# Altium PCB MicrobitBoardExtend.PcbDoc
Units mil, origin at the board's own origin, x right, y up, seen from the top; angles counter-clockwise.
Board outline 2750 x 1700 mil, 2 copper layers (Top Layer, Bottom Layer); 43 components, 43 nets, 189 pads, 0 vias.
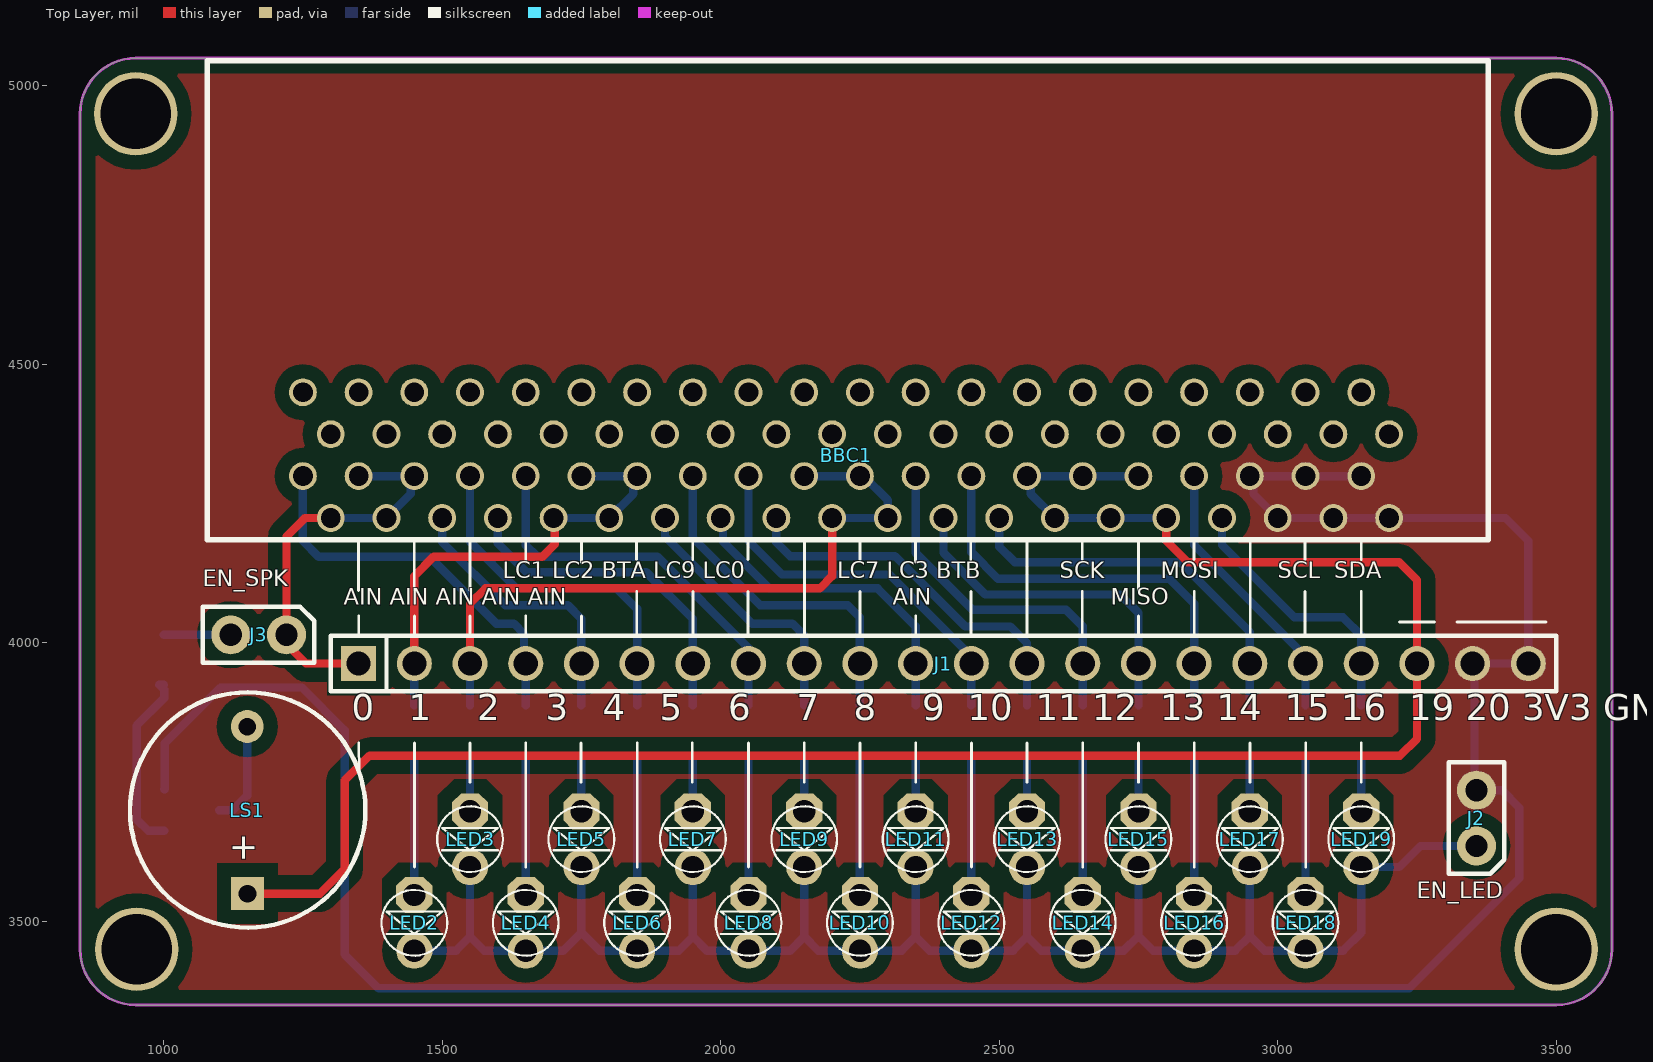
[diagram p0: Top Layer view]
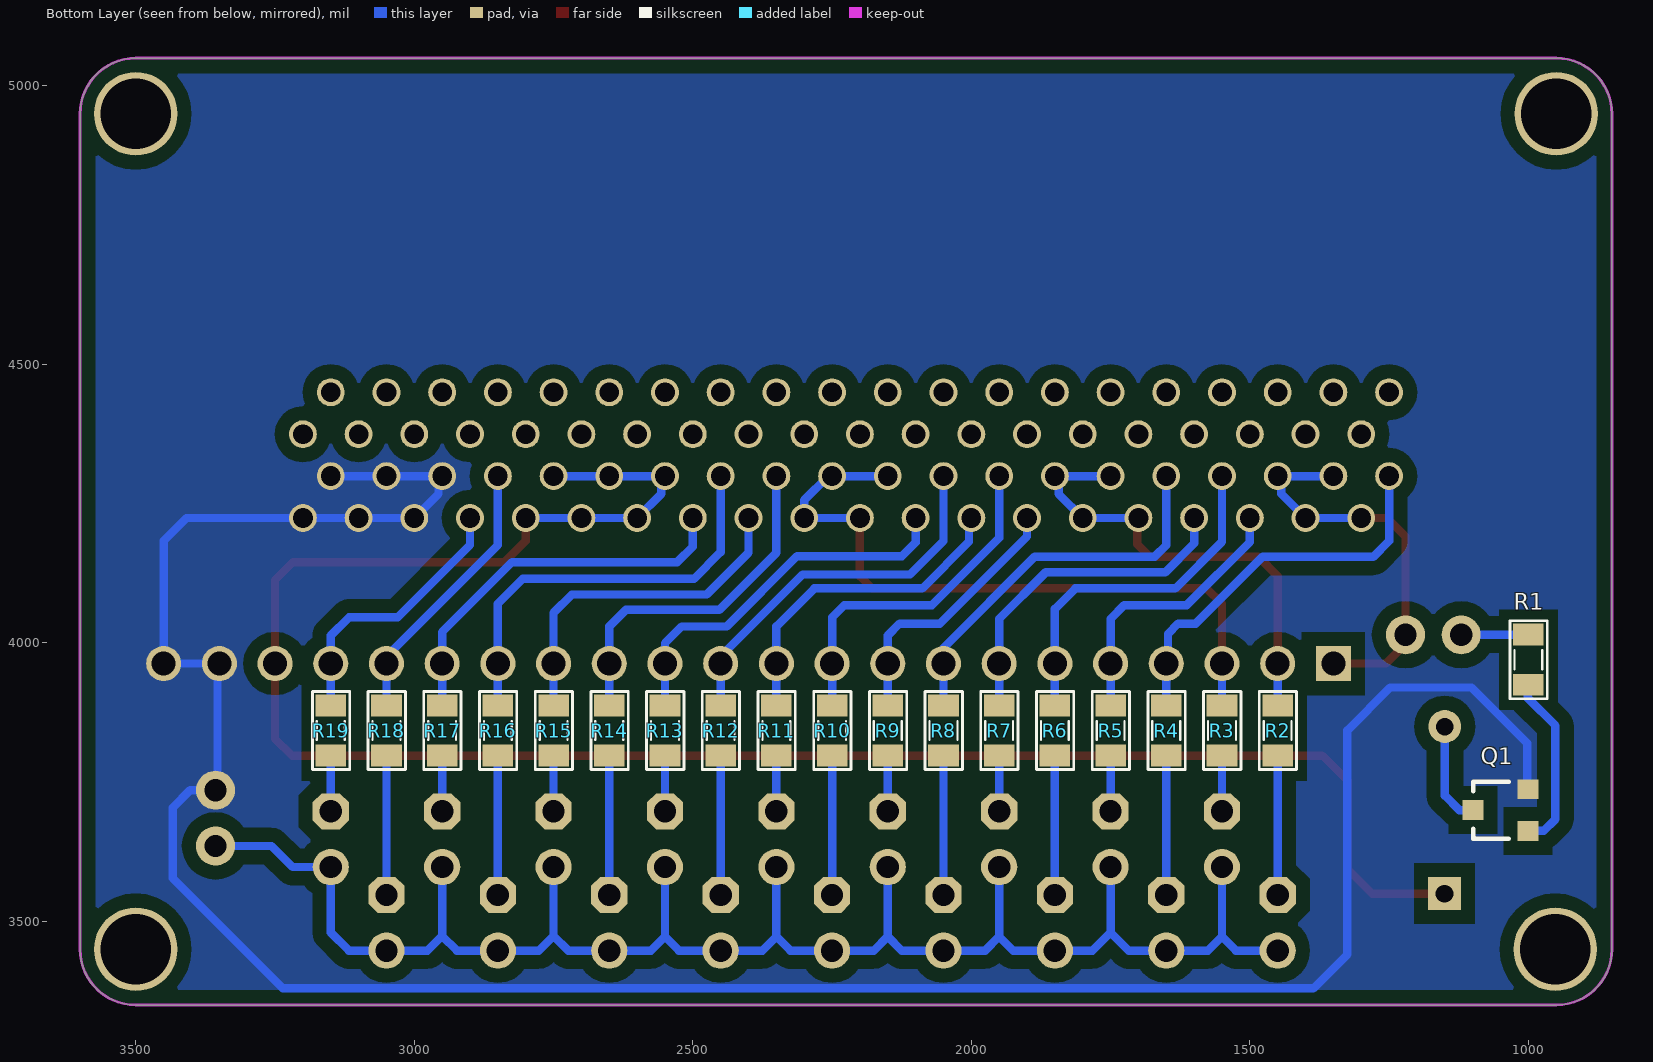
[diagram p1: Bottom Layer view, seen from below]
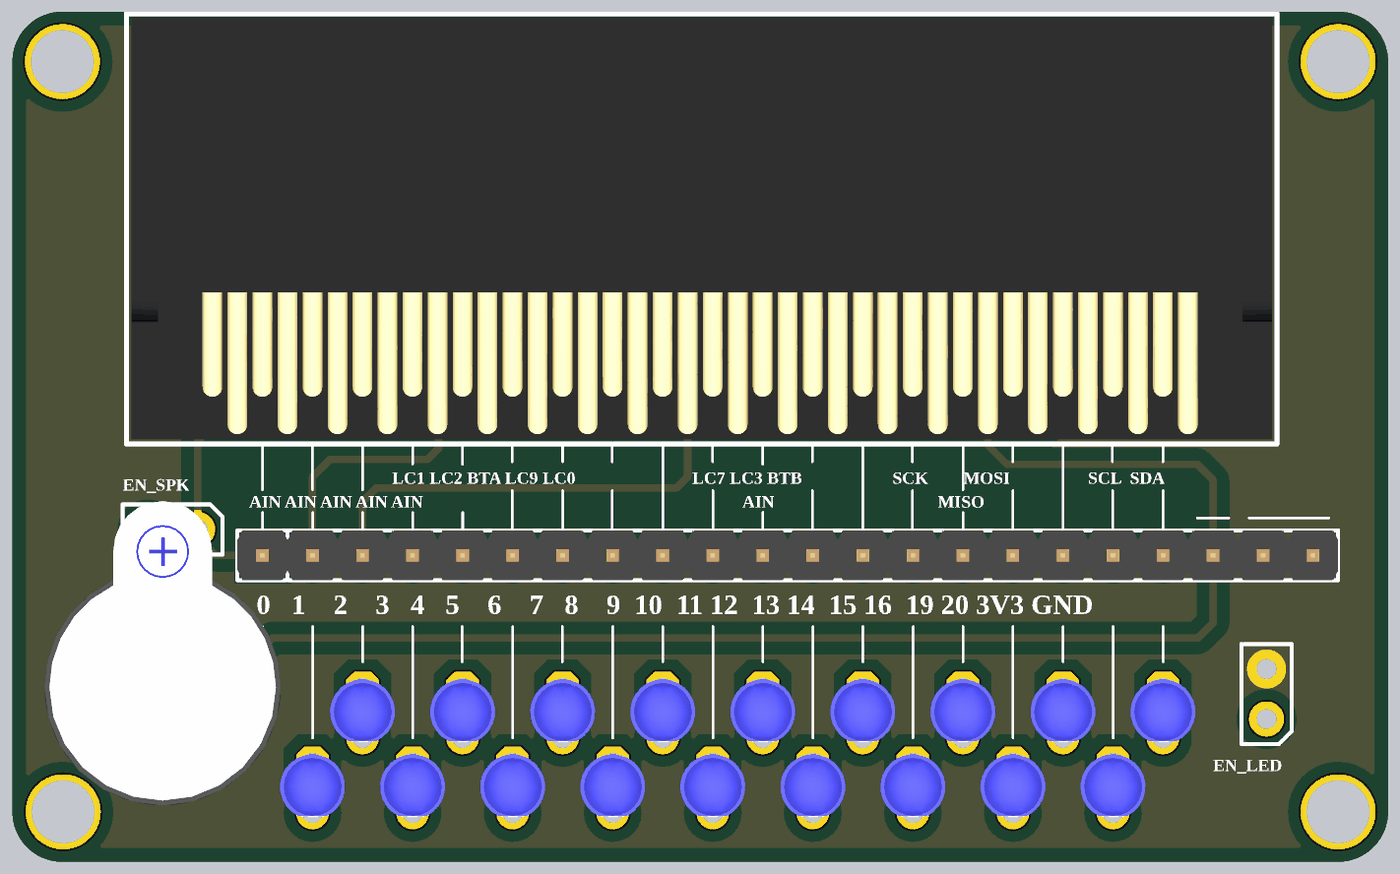
[diagram p2: 3D render of the assembled board from above, using the file's embedded part models]
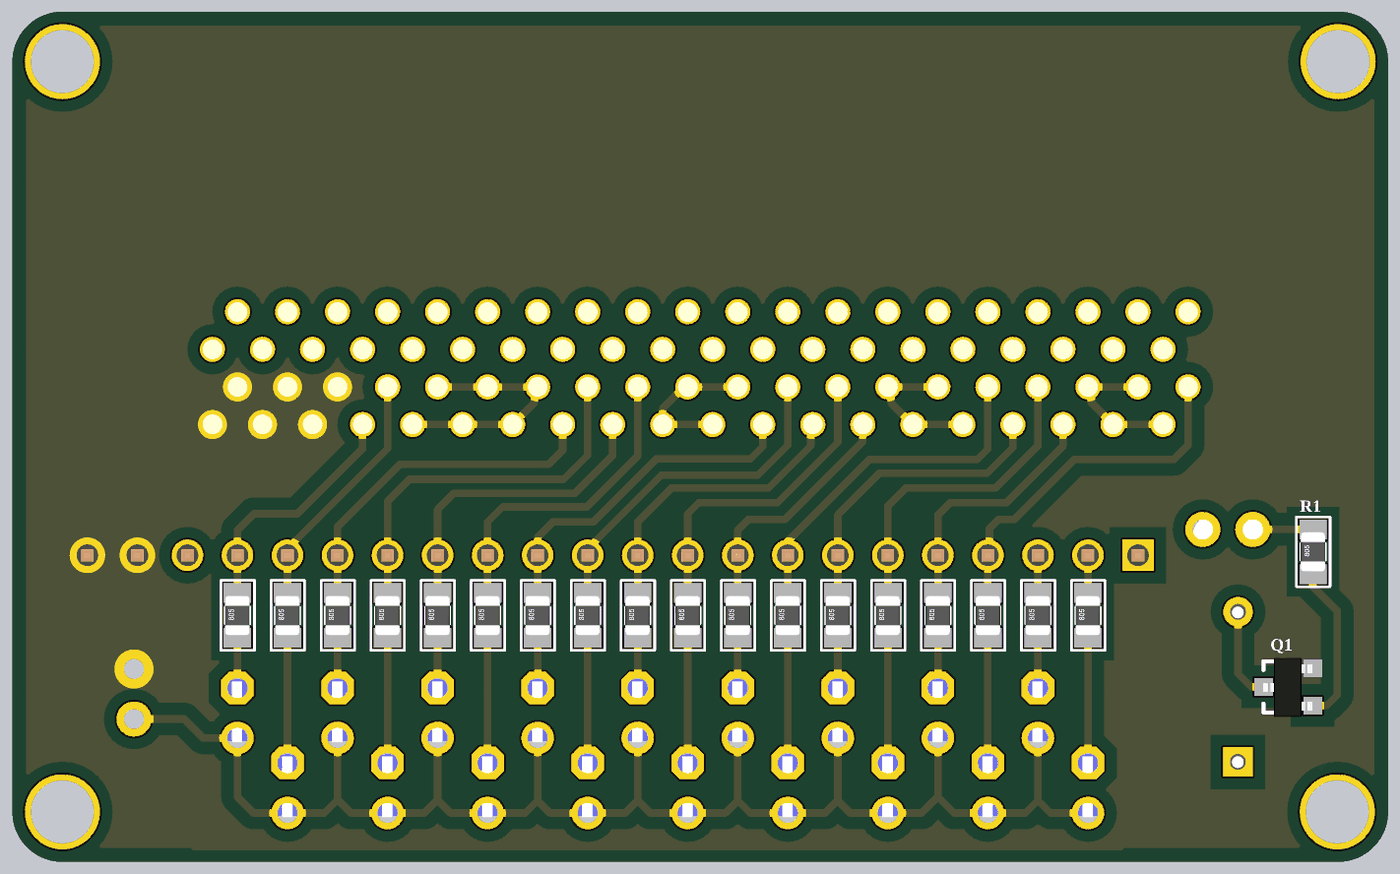
[diagram p3: 3D render of the assembled board from below, using the file's embedded part models]

## Layer stack, top to bottom
Top Solder: solder mask 0.4, Solder Resist, Dk 3.5
Top Layer: signal copper 1.4
Dielectric 1: dielectric 12.6, FR-4, Dk 4.8
Bottom Layer: signal copper 1.4
Bottom Solder: solder mask 0.4, Solder Resist, Dk 3.5

## Board outline
950,3350 cw(c950,3450) 850,3450 850,4950 cw(c950,4950) 950,5050 3500,5050 cw(c3500,4950) 3600,4950 3600,3450 cw(c3500,3450) 3500,3350

## Design rules (kind name [scope] priority, off if disabled: settings)
Clearance Clearance_2 [InNamedPolygon('Top Layer-No Net')] p1: gap=25 ignorepadtopadclearanceinfootprint=FALSE
Clearance Clearance_1 [InNamedPolygon('Top Layer-No Net1')] p2: gap=25 ignorepadtopadclearanceinfootprint=FALSE
Clearance [All] p3: gap=10 ignorepadtopadclearanceinfootprint=FALSE
PolygonConnect PolygonConnect_5 [All vs IsNamedPolygon('Top Layer-No Net')] p1: thpad.connectstyle=Direct thpad.reliefconductorwidth=10 thpad.reliefentries=4 thpad.polygonreliefangle="90 Angle" thpad.airgapwidth=10 smdpad.connectstyle=Direct smdpad.reliefconductorwidth=10 smdpad.reliefentries=4 smdpad.polygonreliefangle="90 Angle" smdpad.airgapwidth=10 via.connectstyle=Relief via.reliefconductorwidth=10 via.reliefentries=4 via.polygonreliefangle="90 Angle" via.airgapwidth=10
PolygonConnect PolygonConnect_4 [All vs IsNamedPolygon('Top Layer-No Net1')] p2: thpad.connectstyle=Direct thpad.reliefconductorwidth=10 thpad.reliefentries=4 thpad.polygonreliefangle="90 Angle" thpad.airgapwidth=10 smdpad.connectstyle=Direct smdpad.reliefconductorwidth=10 smdpad.reliefentries=4 smdpad.polygonreliefangle="90 Angle" smdpad.airgapwidth=10 via.connectstyle=Relief via.reliefconductorwidth=10 via.reliefentries=4 via.polygonreliefangle="90 Angle" via.airgapwidth=10
PolygonConnect PolygonConnect_3 [All vs IsNamedPolygon('Top Layer-No Net1')] p3: thpad.connectstyle=Direct thpad.reliefconductorwidth=10 thpad.reliefentries=4 thpad.polygonreliefangle="90 Angle" thpad.airgapwidth=10 smdpad.connectstyle=Direct smdpad.reliefconductorwidth=10 smdpad.reliefentries=4 smdpad.polygonreliefangle="90 Angle" smdpad.airgapwidth=10 via.connectstyle=Relief via.reliefconductorwidth=10 via.reliefentries=4 via.polygonreliefangle="90 Angle" via.airgapwidth=10
PolygonConnect PolygonConnect_2 [All vs IsNamedPolygon('Top Layer-No Net1')] p4: thpad.connectstyle=Direct thpad.reliefconductorwidth=10 thpad.reliefentries=4 thpad.polygonreliefangle="90 Angle" thpad.airgapwidth=10 smdpad.connectstyle=Direct smdpad.reliefconductorwidth=10 smdpad.reliefentries=4 smdpad.polygonreliefangle="90 Angle" smdpad.airgapwidth=10 via.connectstyle=Relief via.reliefconductorwidth=10 via.reliefentries=4 via.polygonreliefangle="90 Angle" via.airgapwidth=10
PolygonConnect PolygonConnect_1 [All vs IsNamedPolygon('Top Layer-No Net')] p5: thpad.connectstyle=Direct thpad.reliefconductorwidth=10 thpad.reliefentries=4 thpad.polygonreliefangle="90 Angle" thpad.airgapwidth=10 smdpad.connectstyle=Direct smdpad.reliefconductorwidth=10 smdpad.reliefentries=4 smdpad.polygonreliefangle="90 Angle" smdpad.airgapwidth=10 via.connectstyle=Relief via.reliefconductorwidth=10 via.reliefentries=4 via.polygonreliefangle="90 Angle" via.airgapwidth=10
PolygonConnect [All] p6: connectstyle=Relief reliefconductorwidth=10 reliefentries=4 polygonreliefangle="90 Angle" airgapwidth=10
RoutingVias [All] p1: holewidth=28 width=50 viastyle="Through Hole" minholewidth=28 minwidth=50 maxholewidth=28 maxwidth=50
SolderMaskExpansion [All] p1: expansion=4
Width [All] p1: maxlimit=50 minlimit=10 preferedwidth=20
30 further rules are at their usual default settings.

## Components (designator, comment, footprint, x,y, rotation, side; value= is the part's Value field where it differs from the comment)
BBC1 "BBC_SOCKET" BBC_SK_DIP 2208,4685.63 r0 top locked
J1 "JP22" JP22-D1T 1350,3963.04 r0 top
J2 "EN_LED" JP2-CLOSED 3356.89,3635.62 r180 top
J3 "EN_SPK" JP2-CLOSED 1220.47,4014.68 r270 top locked
LED2 "LED" LED-3MM-BLUE 1450,3492.68 r270 top value="LED 3 ly Single Colour"
LED3 "LED" LED-3MM-BLUE 1550,3642.68 r270 top value="LED 3 ly Single Colour"
LED4 "LED" LED-3MM-BLUE 1650,3492.68 r270 top value="LED 3 ly Single Colour"
LED5 "LED" LED-3MM-BLUE 1750,3642.68 r270 top value="LED 3 ly Single Colour"
LED6 "LED" LED-3MM-BLUE 1850,3492.68 r270 top value="LED 3 ly Single Colour"
LED7 "LED" LED-3MM-BLUE 1950,3642.68 r270 top value="LED 3 ly Single Colour"
LED8 "LED" LED-3MM-BLUE 2050,3492.68 r270 top value="LED 3 ly Single Colour"
LED9 "LED" LED-3MM-BLUE 2150,3642.68 r270 top value="LED 3 ly Single Colour"
LED10 "LED" LED-3MM-BLUE 2250,3492.68 r270 top value="LED 3 ly Single Colour"
LED11 "LED" LED-3MM-BLUE 2350,3642.68 r270 top value="LED 3 ly Single Colour"
LED12 "LED" LED-3MM-BLUE 2450,3492.68 r270 top value="LED 3 ly Single Colour"
LED13 "LED" LED-3MM-BLUE 2550,3642.68 r270 top value="LED 3 ly Single Colour"
LED14 "LED" LED-3MM-BLUE 2650,3492.68 r270 top value="LED 3 ly Single Colour"
LED15 "LED" LED-3MM-BLUE 2750,3642.68 r270 top value="LED 3 ly Single Colour"
LED16 "LED" LED-3MM-BLUE 2850,3492.68 r270 top value="LED 3 ly Single Colour"
LED17 "LED" LED-3MM-BLUE 2950,3642.68 r270 top value="LED 3 ly Single Colour"
LED18 "LED" LED-3MM-BLUE 3050,3492.68 r270 top value="LED 3 ly Single Colour"
LED19 "LED" LED-3MM-BLUE 3150,3642.68 r270 top value="LED 3 ly Single Colour"
LS1 "Speaker" SPEAKER 1150.5,3550 r90 top
Q1 "2SC1815" SOT23-321 1050,3700 r90 bottom value=C1815
R1 "1k" RES-SMD-0805 1000,3970 r90 bottom
R2 "100" RES-SMD-0805 1450,3842.68 r90 bottom
R3 "100" RES-SMD-0805 1550,3842.68 r90 bottom
R4 "100" RES-SMD-0805 1650,3842.68 r90 bottom
R5 "100" RES-SMD-0805 1750,3842.68 r90 bottom
R6 "100" RES-SMD-0805 1850,3842.68 r90 bottom
R7 "100" RES-SMD-0805 1950,3842.68 r90 bottom
R8 "100" RES-SMD-0805 2050,3842.68 r90 bottom
R9 "100" RES-SMD-0805 2150,3842.68 r90 bottom
R10 "100" RES-SMD-0805 2250,3842.68 r90 bottom
R11 "100" RES-SMD-0805 2350,3842.68 r90 bottom
R12 "100" RES-SMD-0805 2450,3842.68 r90 bottom
R13 "100" RES-SMD-0805 2550,3842.68 r90 bottom
R14 "100" RES-SMD-0805 2650,3842.68 r90 bottom
R15 "100" RES-SMD-0805 2750,3842.68 r90 bottom
R16 "100" RES-SMD-0805 2850,3842.68 r90 bottom
R17 "100" RES-SMD-0805 2950,3842.68 r90 bottom
R18 "100" RES-SMD-0805 3050,3842.68 r90 bottom
R19 "100" RES-SMD-0805 3150,3842.68 r90 bottom

## Footprints (in the part's own frame and the unit in brackets; to place one, negate y for a bottom-side part, rotate by r counter-clockwise, add the part's x,y. Pads: shape width x height; smd on the part's side, far side on the other; paste and mask are expansions set on the pad)
BBC_SK_DIP [mil]
  round 50 / inner round 60 / far side round 50 hole 35.43: 1(-958,-386.02) 2(-908,-461.22) 3(-858,-386.02) 4(-808,-461.22) 5(-758,-386.02) 6(-708,-461.22) 7(-658,-386.02) 8(-608,-461.22) 9(-558,-386.02) 10(-508,-461.22) 11(-458,-386.02) 12(-408,-461.22) 13(-358,-386.02) 14(-308,-461.22) 15(-258,-386.02) 16(-208,-461.22) 17(-158,-386.02) 18(-108,-461.22) 19(-58,-386.02) 20(-8,-461.22) 21(42,-386.02) 22(92,-461.22) 23(142,-386.02) 24(192,-461.22) 25(242,-386.02) 26(292,-461.22) 27(342,-386.02) 28(392,-461.22) 29(442,-386.02) 30(492,-461.22) 31(542,-386.02) 32(592,-461.22) 33(642,-386.02) 34(692,-461.22) 35(742,-386.02) 36(792,-461.22) 37(842,-386.02) 38(892,-461.22) 39(942,-386.02) 40(992,-461.22) 41(-958,-235.63) 42(-908,-310.82) 43(-858,-235.63) 44(-808,-310.82) 45(-758,-235.63) 46(-708,-310.82) 47(-658,-235.63) 48(-608,-310.82) 49(-558,-235.63) 50(-508,-310.82) 51(-458,-235.63) 52(-408,-310.82) 53(-358,-235.63) 54(-308,-310.82) 55(-258,-235.63) 56(-208,-310.82) 57(-158,-235.63) 58(-108,-310.82) 59(-58,-235.63) 60(-8,-310.82) 61(42,-235.63) 62(92,-310.82) 63(142,-235.63) 64(192,-310.82) 65(242,-235.63) 66(292,-310.82) 67(342,-235.63) 68(392,-310.82) 69(442,-235.63) 70(492,-310.82) 71(542,-235.63) 72(592,-310.82) 73(642,-235.63) 74(692,-310.82) 75(742,-235.63) 76(792,-310.82) 77(842,-235.63) 78(892,-310.82) 79(942,-235.63) 80(992,-310.82)
  silkscreen extent -1130,-500 1170,360, body extent -1120,-491 1160,353, height 366
JP2-CLOSED [mil]
  round 70 hole 40: 1(0,0) 2(0,-100)
  silkscreen extent -50,-150 50,50, body extent -50,-152 50,50, height 300
JP22-D1T [mm] "22 pins, 1 row, straight, gold plating"
  rect 1.6x1.6 hole 1.1: 1(0,0)
  round 1.6 hole 1.1: 2(2.54,0) 3(5.08,0) 4(7.62,0) 5(10.16,0) 6(12.7,0) 7(15.24,0) 8(17.78,0) 9(20.32,0) 10(22.86,0) 11(25.4,0) 12(27.94,0) 13(30.48,0) 14(33.02,0) 15(35.56,0) 16(38.1,0) 17(40.64,0) 18(43.18,0) 19(45.72,0) 20(48.26,0) 21(50.8,0) 22(53.34,0)
  silkscreen extent -1.27,-1.27 54.61,1.27, body extent -1.27,-1.27 54.61,1.27, height 8.54
LED-3MM-BLUE [mil]
  oct 65x65 hole 40: 1(-55,0)
  round 65 hole 40: 2(45,0)
  silkscreen extent -64,-59 54,59, body extent -72,-65 54,65, height 184
RES-SMD-0805 [mil]
  rect 39.37x55 smd: 1(-45,0) 2(45,0)
  silkscreen extent -70,-34 70,33, body extent -39,-25 39,25, height 31
SOT23-321 [mm]
  rect 0.9x0.95 smd mask+0: 1(0.95,-1.25)
  rect 0.9x0.95 smd: 2(0,1.25) 3(-0.95,-1.25)
  silkscreen extent -1.3,-0.38 1.3,1.25, body extent -1.52,-1.23 1.48,1.27, height 1.06
SPEAKER [mm]
  rect 1.5x1.5 hole 0.8: 1(0,0)
  round 1.5 hole 0.8: 2(7.62,0.013)
  silkscreen extent -1.55,-5.38 9.18,5.36, body extent -2.22,-6 13.24,6, height 4.5

## Part data
J1: "WR-PHD 2.54 mm Angled Socket Header", Manufacturer="Würth Elektronik eiSos GmbH", partNo=613022143121, ComponentLink1 Description=Manufacturer, ComponentLink1URL=http://www.we-online.com, ComponentLink2 Description=Datasheet, ComponentLink2URL=http://katalog.we-online.de/em/datasheet/6130xx143121.pdf, Created by="Karrer Zheng", Created Date="29 March 2013", NoPins=22
J2 J3: library part JP2, "WR-PHD 2.54 mm Angled Socket Header", Manufacturer="Würth Elektronik eiSos GmbH", partNo=613002143121, ComponentLink1 Description=Manufacturer, ComponentLink1URL=http://www.we-online.com, ComponentLink2 Description=Datasheet, ComponentLink2URL=http://katalog.we-online.de/em/datasheet/6130xx143121.pdf, Created by="Karrer Zheng", Created Date="29 March 2013", NoPins=02
LED2 LED3 LED4 LED5 LED6 LED7 LED8 LED9 LED10 LED11 LED12 LED13 LED14 LED15 LED16 LED17 LED18 LED19: "LED Single colour Green and Red"
LS1: "Loudspeaker", LatestRevisionDate=17-Jul-2002, LatestRevisionNote="Re-released for DXP Platform.", PackageReference=PIN2, Published=24-Mar-1999, Publisher="Altium Limited"
Q1: "NPN 600mW, ECB", =C2383
R1 R2 R3 R4 R5 R6 R7 R8 R9 R10 R11 R12 R13 R14 R15 R16 R17 R18 R19: library part Res-SMD, "Resistor", Manufacturer="Generic Components", Class=Passive, Published=08/06/2000, Publisher="Altium Hobart Technology Centre"
BBC1: DeviceName=BBC_SOCKET, DeviceSetName=BBC_SOCKET, LibraryName=microbit, Package=BBC_SOCKET

## Free pads (board coordinates)
  round 150 hole 125.98: 2(951.57,3450) 3(3500,3450) 4(950,4950) 5(3500,4950)

## Nets (pads, with @x,y where several pads share a name; then routed paths per layer and width w, separated by ;. In a path a pad name is that pad's centre, name@x,y a point inside that pad or via, vN(x,y) a via of type N, cw(c..) or ccw(c..) an arc to the next point about the centre after c; other vN are vias at no path point)
+3.3: BBC1.27 BBC1.28 BBC1.29 BBC1.30 BBC1.31 BBC1.32 J1.20 LS1.1 | length 3618.3
  Top Layer w15: LS1.1 1280.57,3550 1325,3594.43 1325,3753 1369.69,3797.68 3219.68,3797.68 3250,3828 J1.20 3250,4113 3218,4145 2838,4145 2800,4183 BBC1.32
  Bottom Layer w15: BBC1.31 BBC1.29 BBC1.27 2556.7,4292.91 2556.7,4267.71 BBC1.28 BBC1.30 BBC1.32 BBC1.32@2793.3,4231.11
GND: BBC1.35 BBC1.36 BBC1.37 BBC1.38 BBC1.39 BBC1.40 J1.21 J1.22 J2.2 Q1.1 | length 4628
  Bottom Layer w15: Q1.1 1001.77,3737.4 1001.77,3819.77 1102,3920 1248,3920 1325,3843 1325,3441 1386,3380 3236,3380 3434,3578 3434,3704 3402.38,3735.62 J2.2 3353.45,3739.07 3353.45,3959.6 J1.21 J1.22 3450,4183.41 3409,4224.41 BBC1.40 BBC1.38 BBC1.36 2956.7,4267.71 2956.7,4292.91 BBC1.35 BBC1.37 BBC1.39
NetJ2_1: J2.1 LED2.2 LED3.2 LED4.2 LED5.2 LED6.2 LED7.2 LED8.2 LED9.2 LED10.2 LED11.2 LED12.2 LED13.2 LED14.2 LED15.2 LED16.2 LED17.2 LED18.2 LED19.2 | length 3217.5
  Bottom Layer w15: LED2.2 1525,3447.68 1550,3472.68 ; LED3.2 1550,3472.68 ; LED5.2 1750,3480.18 ; LED7.2 1950,3472.68 ; LED9.2 2150,3472.68 ; LED11.2 2350,3472.68 ; LED13.2 2550,3472.68 ; LED15.2 2750,3474.02 ; LED17.2 2950,3474.02 ; J2.1 3256.44,3635.62 3218.5,3597.68 LED19.2 3150,3480.18 3117.5,3447.68 LED18.2 2976.33,3447.68 2950,3474.02 ; 1550,3472.68 1575,3447.68 LED4.2 1717.5,3447.68 1750,3480.18 ; 1750,3480.18 1782.5,3447.68 LED6.2 1925,3447.68 1950,3472.68 ; 1950,3472.68 1975,3447.68 LED8.2 2125,3447.68 2150,3472.68 ; 2150,3472.68 2175,3447.68 LED10.2 2325,3447.68 2350,3472.68 ; 2350,3472.68 2375,3447.68 LED12.2 2525,3447.68 2550,3472.68 ; 2550,3472.68 2575,3447.68 LED14.2 2723.67,3447.68 2750,3474.02 ; 2750,3474.02 2776.33,3447.68 LED16.2 2923.67,3447.68 2950,3474.02
NetJ3_2: J3.2 R1.2 | length 120.6
  Bottom Layer w15: R1.2 1000.16,4014.84 1120.31,4014.84 J3.2
NetLED2_1: LED2.1 R2.1 | length 250
  Bottom Layer w15: LED2.1 R2.1
NetLED3_1: LED3.1 R3.1 | length 100
  Bottom Layer w15: LED3.1 R3.1
NetLED4_1: LED4.1 R4.1 | length 250
  Bottom Layer w15: LED4.1 R4.1
NetLED5_1: LED5.1 R5.1 | length 100
  Bottom Layer w15: LED5.1 R5.1
NetLED6_1: LED6.1 R6.1 | length 250
  Bottom Layer w15: LED6.1 R6.1
NetLED7_1: LED7.1 R7.1 | length 100
  Bottom Layer w15: LED7.1 R7.1
NetLED8_1: LED8.1 R8.1 | length 250
  Bottom Layer w15: LED8.1 R8.1
NetLED9_1: LED9.1 R9.1 | length 100
  Bottom Layer w15: LED9.1 R9.1
NetLED10_1: LED10.1 R10.1 | length 250
  Bottom Layer w15: LED10.1 R10.1
NetLED11_1: LED11.1 R11.1 | length 100
  Bottom Layer w15: LED11.1 R11.1
NetLED12_1: LED12.1 R12.1 | length 250
  Bottom Layer w15: LED12.1 R12.1
NetLED13_1: LED13.1 R13.1 | length 100
  Bottom Layer w15: LED13.1 R13.1
NetLED14_1: LED14.1 R14.1 | length 250
  Bottom Layer w15: LED14.1 R14.1
NetLED15_1: LED15.1 R15.1 | length 100
  Bottom Layer w15: LED15.1 R15.1
NetLED16_1: LED16.1 R16.1 | length 250
  Bottom Layer w15: LED16.1 R16.1
NetLED17_1: LED17.1 R17.1 | length 100
  Bottom Layer w15: LED17.1 R17.1
NetLED18_1: LED18.1 R18.1 | length 250
  Bottom Layer w15: LED18.1 R18.1
NetLED19_1: LED19.1 R19.1 | length 100
  Bottom Layer w15: LED19.1 R19.1
NetLS1_2: LS1.2 Q1.2 | length 185.6
  Bottom Layer w15: Q1.2 1124,3700 1150,3726 LS1.2
NetQ1_3: Q1.3 R1.1 | length 331.1
  Bottom Layer w15: R1.1 992.19,3925 1000.79,3916.4 1000.79,3900.79 951.57,3851.57 951.57,3683.52 972.5,3662.6 Q1.3
P0: BBC1.2 BBC1.3 BBC1.4 BBC1.5 J1.1 J3.1 | length 726.5
  Top Layer w15: BBC1.2 1253.41,4224.41 1220.47,4191.47 J3.1 1220.47,3998.04 1255.47,3963.04 J1.1
  Bottom Layer w15: BBC1.2 BBC1.4 1443.3,4267.71 1443.3,4292.91 BBC1.5 BBC1.3
P1: BBC1.10 BBC1.11 BBC1.12 BBC1.13 J1.2 R2.2 | length 852.1
  Top Layer w15: J1.2 1450,4120 1484.75,4154.75 1679.75,4154.75 1702,4177 1702,4222.41 BBC1.10
  Bottom Layer w15: R2.2 J1.2 ; BBC1.10 BBC1.12 1843.3,4267.71 1843.3,4292.91 BBC1.13 BBC1.11
P2: BBC1.19 BBC1.20 BBC1.21 BBC1.22 J1.3 R3.2 | length 1257.6
  Top Layer w15: J1.3 1550,4070.5 1577.5,4098 2178,4098 2200,4120 BBC1.20
  Bottom Layer w15: R3.2 J1.3 ; BBC1.19 BBC1.21 2256.7,4299.61 2300,4256.31 BBC1.22 BBC1.20
P3: BBC1.1 J1.4 R4.2 | length 712.6
  Bottom Layer w15: BBC1.1 1250,4183 1278.25,4154.75 1477,4154.75 1597.07,4034.68 1628.7,4034.68 1647,4016.39 1647,3966.04 J1.4 R4.2
P4: BBC1.6 J1.5 R5.2 | length 506
  Bottom Layer w15: BBC1.6 1500,4181.25 1613.25,4068 1725.43,4068 1750,4043.43 J1.5 R5.2
P5: BBC1.7 J1.6 R6.2 | length 641.4
  Bottom Layer w15: BBC1.7 1550,4181.75 1633.75,4098 1813.3,4098 1850,4061.3 J1.6 R6.2
P6: BBC1.8 J1.7 R7.2 | length 607.5
  Bottom Layer w15: BBC1.8 1600,4178.75 1651.75,4127 1866.43,4127 1950,4043.43 J1.7 R7.2
P7: BBC1.9 J1.8 R8.2 | length 703.8
  Bottom Layer w15: BBC1.9 1650,4175.75 1671,4154.75 1886.43,4154.75 2050,3991.18 J1.8 R8.2
P8: BBC1.14 J1.9 R9.2 | length 482.6
  Bottom Layer w15: BBC1.14 1900,4191.09 2056.41,4034.68 2128.7,4034.68 2150,4013.39 J1.9 R9.2
P9: BBC1.15 J1.10 R10.2 | length 628.5
  Bottom Layer w15: BBC1.15 1950,4188.5 2070.5,4068 2228,4068 2250,4046 J1.10 R10.2
P10: BBC1.16 J1.11 R11.2 | length 595.2
  Bottom Layer w15: BBC1.16 2004.09,4220.32 2004.09,4181.91 2088,4098 2281.75,4098 2350,4029.75 J1.11 R11.2
P11: BBC1.17 J1.12 R12.2 | length 690.6
  Bottom Layer w15: BBC1.17 2050,4183 2110,4123 2302.93,4123 2450,3975.93 J1.12 R12.2
P12: BBC1.18 J1.13 R13.2 | length 680.8
  Bottom Layer w15: BBC1.18 2100,4180.5 2124.5,4156 2312.68,4156 2439.05,4029.64 2520.05,4029.64 2550,3999.68 J1.13 R13.2
P13: BBC1.23 J1.14 R14.2 | length 634.5
  Bottom Layer w15: BBC1.23 2350,4162 2452.32,4059.68 2620.07,4059.68 2650,4029.75 J1.14 R14.2
P14: BBC1.24 J1.15 R15.2 | length 623.6
  Bottom Layer w15: BBC1.24 2400,4162 2475,4087 2717.25,4087 2750,4054.25 J1.15 R15.2
P15: BBC1.25 J1.16 R16.2 | length 757.7
  Bottom Layer w15: BBC1.25 2450,4163 2498,4115 2805.5,4115 2850,4070.5 J1.16 R16.2
P16: BBC1.26 J1.17 R17.2 | length 696.8
  Bottom Layer w15: BBC1.26 2500,4173 2528,4145 2824.5,4145 2950,4019.5 J1.17 R17.2
P19: BBC1.33 J1.18 R18.2 | length 494.8
  Bottom Layer w15: BBC1.33 2850,4176 3050,3976 J1.18 R18.2
P20: BBC1.34 J1.19 R19.2 | length 491.5
  Bottom Layer w15: BBC1.34 2900,4176 3030,4046 3117.39,4046 3150,4013.39 J1.19 R19.2
pads on no net: BBC1.41 BBC1.42 BBC1.43 BBC1.44 BBC1.45 BBC1.46 BBC1.47 BBC1.48 BBC1.49 BBC1.50 BBC1.51 BBC1.52 BBC1.53 BBC1.54 BBC1.55 BBC1.56 BBC1.57 BBC1.58 BBC1.59 BBC1.60 BBC1.61 BBC1.62 BBC1.63 BBC1.64 BBC1.65 BBC1.66 BBC1.67 BBC1.68 BBC1.69 BBC1.70 BBC1.71 BBC1.72 BBC1.73 BBC1.74 BBC1.75 BBC1.76 BBC1.77 BBC1.78 BBC1.79 BBC1.80

## Polygon pours and split planes (outlines as drawn)
GND on Top Layer "Top Layer-No Net" (solid, remove dead copper, pour order 0): 950,3350 cw(c950,3450) 850,3450 850,4950 cw(c950,4950) 950,5050 3500,5050 cw(c3500,4950) 3600,4950 3600,3450 cw(c3500,3450) 3500,3350
GND on Bottom Layer "Top Layer-No Net1" (solid, remove dead copper, pour order 1): 950,3350 cw(c950,3450) 850,3450 850,4950 cw(c950,4950) 950,5050 3500,5050 cw(c3500,4950) 3600,4950 3600,3450 cw(c3500,3450) 3500,3350

## Keep-outs
Keep-Out Layer:
  lines w5: 850,3450 ccw(c950,3450) 950,3350 3500,3350 ccw(c3500,3450) 3600,3450 3600,4950 ccw(c3500,4950) 3500,5050 1025,5050 950,5050 ccw(c950,4950) 850,4950 850,3450

## Silkscreen, mask and mechanical layers (free items; w line width, h text height)
Top Overlay:
  lines w5: 1350,4094 1350,4183 ; 1350.21,3820.47 1351.06,3767.73 ; 1350.21,4012.04 1350.21,4048.47 ; 1450,4094 1450,4183 ; 1450.21,3597.68 1450.21,3820.47 ; 1450.21,4012.04 1450.21,4048.47 ; 1550,4094 1550,4183 ; 1550.15,3750 1550.15,3820.47 ; 1550.21,4012.04 1550.21,4048.47 ; 1650,4145 1650,4183 ; 1650.21,3597.68 1650.21,3820.47 ; 1650.21,4012.04 1650.21,4048.47 ; 1749.15,3750 1749.15,3820.47 ; 1750,4145 1750,4183 ; 1750.21,4012.04 1750.21,4048.47 ; 1849,4150 1849,4188 ; 1849.21,4017.04 1849.21,4092.34 ; 1850.21,3597.68 1850.21,3820.47 ; 1949.15,3750 1949.15,3820.47 ; 1950,4150 1950,4188 ; 1950.21,4017.04 1950.21,4092.34 ; 2049,4150 2049,4188 ; 2049.21,4017.04 2049.21,4092.34 ; 2050.21,3597.68 2050.21,3820.47 ; 2149.52,4185.63 2150.4,4184.75 2150.4,4013.04 ; 2150.15,3750 2150.15,3820.47 ; 2250,4150 2250,4188 ; 2250.21,3597.68 2250.21,3820.47 ; 2250.21,4017.04 2250.21,4092.34 ; 2350,4145.32 2350,4183.32 ; 2350.15,3750 2350.15,3820.47 ; 2350.21,4012.36 2350.21,4048.79 ; 2449,4150 2449,4188 ; 2449.21,4017.04 2449.21,4092.34 ; 2450.21,3597.68 2450.21,3820.47 ; 2549.18,4185.63 2550.06,4184.75 2550.06,4013.04 ; 2550.15,3750 2550.15,3820.47 ; 2649,4150 2649,4188 ; 2649.21,4017.04 2649.21,4092.34 ; 2650.21,3597.68 2650.21,3820.47 ; 2750,4094 2750,4183 ; 2750.15,3750 2750.15,3820.47 ; 2750.21,4012.04 2750.21,4048.47 ; 2850,4150 2850,4188 ; 2850.21,3597.68 2850.21,3820.47 ; 2850.21,4017.04 2850.21,4092.34 ; 2950.15,3750 2950.15,3820.47 ; 2950.61,4013.04 2950.61,4184.75 2951.5,4185.63 ; 3049,4150 3049,4188 ; 3049.21,4017.04 3049.21,4092.34 ; 3050.21,3597.68 3050.21,3820.47 ; 3150,4150 3150,4188 ; 3150.15,3750 3150.15,3820.47 ; 3150.21,4017.04 3150.21,4092.34 ; 3218.5,4037.5 3281.5,4037.5 ; 3321.89,4037.5 3481.5,4037.5
  text "LC1 LC2 BTA LC9 LC0" at 1609,4106 h50
  text "LC7 LC3 BTB" at 2209.06,4106 h50
  text "SCK        MOSI" at 2609.06,4106 h50
  text "SCL  SDA" at 3000,4106 h50
  text "AIN AIN AIN AIN AIN" at 1323.25,4058.37 h50
  text "AIN" at 2309.06,4058.37 h50
  text "MISO" at 2700,4058.37 h50
  text "0   1    2    3   4   5    6    7   8    9  10  11 12  13 14  15 16  19 20 3V3 GND" at 1338,3845.68 h80

## Text inside footprints (layer, text, board x,y; h text height)
LS1: Top Overlay "+" at 1178.5,3605.5 h80 r90